# EAGLE board TEMP(NC_I2C_V2) (EAGLE 6.5.0)
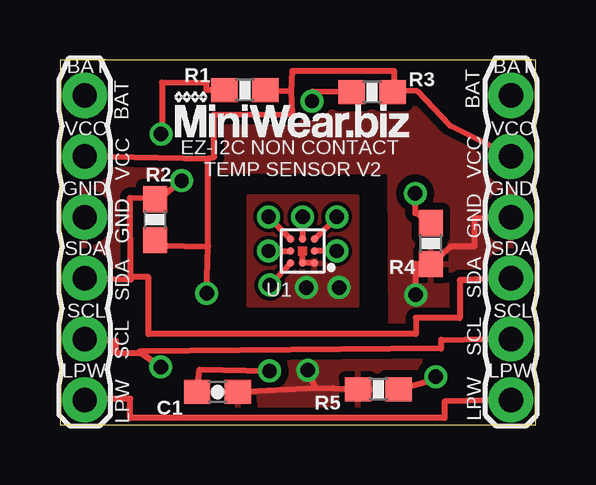
[diagram p0: board, top side]
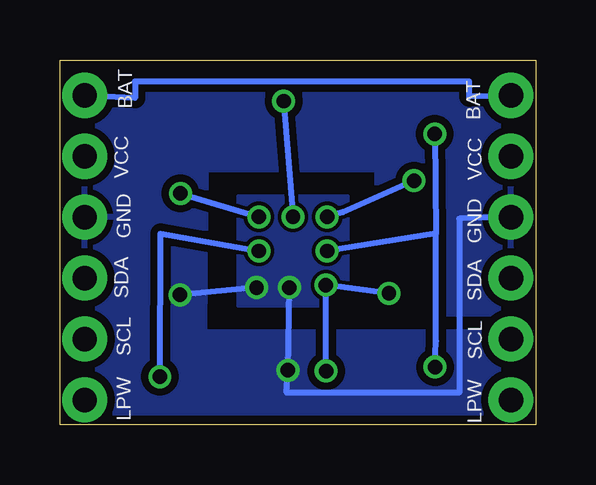
[diagram p1: board, bottom side, seen from below]

Size 19.84 x 15.21 mm. Coordinates in mm from the lower left corner, seen from the top.
Outline: 0,15.21 0,0 19.84,0 19.84,15.21 0,15.21
Copper layers (1*16): Top 0.0356mm / dielectric 1.5011mm / Bottom 0.0356mm
Design rules "oshParkPCBDesignRules": minimum track width 6mil, minimum drill 13mil, track to track 6mil, track to pad 6mil, pad to pad 6mil, via to via 6mil, smd to smd 6mil, copper to edge 15mil, drill to drill 6mil, minimum pad ring 7mil, minimum via ring 7mil, stop-mask expansion 3mil, vias tented up to drill 0mil, thermal gap 10mil

## Footprints (pad centres in the part's own frame; a part is rotated, then mirrored left to right if it is on the bottom)
0603-CAP = smd 1.1 x 1: 1 -0.85,0; 2 0.85,0
0603-RES = smd 1.1 x 1: 1 -0.85,0; 2 0.85,0
BGA8DS = smd 0.305 x 0.305: A1 0.5,-0.5; A2 0,-0.5; A3 -0.5,-0.5; B1 0.5,0; B3 -0.5,0; C1 0.5,0.5; C2 0,0.5; C3 -0.5,0.5
EZ-I2CHEADERV1 = drill 1.016 pad 1.88: BAT 0,-1.27; BAT1 17.78,-1.27; GND 0,-6.35; GND1 17.78,-6.35; LPOW 0,-13.97; LPOW1 17.78,-13.97; SCL 0,-11.43; SCL1 17.78,-11.43; SDA 0,-8.89; SDA1 17.78,-8.89; VCC 0,-3.81; VCC1 17.78,-3.81

## Placement (x,y rotation side)
C1  0.1uF  [0603-CAP]  6.57,1.36 0 top
R1  10k  [0603-RES]  7.71,13.95 0 top
R2  10k  [0603-RES]  3.96,8.55 270 top
R3  10k  [0603-RES]  13.02,13.86 0 top
R4  10k  [0603-RES]  15.47,7.55 90 top
R5  10k  [0603-RES]  13.28,1.47 0 top
U1  TMP006  [BGA8DS]  10.12,7.24 0 top
U$1  EZ-I2CHEADERV1  [EZ-I2CHEADERV1]  1.03,15 0 top
U$2  [LOGO2]  4.69,11.8 0 top

## Library data of the parts
C1 = SparkFun-Capacitors
R1-R5 = SparkFun-Resistors
U1 = SparkFun-DigitalIC
U$1 = UniqueInteractionsLib
U$2 = MiniWear_LOGO

## Nets
!DRDY: R3.1 U1.C2
ADR0: R4.2 U1.C1
ADR1: R5.2 U1.B1
GND: C1.2 R4.1 R5.1 U1.A1 U1.A2 U$1.GND U$1.GND1
N$1: U$1.BAT U$1.BAT1
N$2: U$1.LPOW U$1.LPOW1
SCL: R1.1 U1.B3 U$1.SCL U$1.SCL1
SDA: R2.1 U1.C3 U$1.SDA U$1.SDA1
VCC: C1.1 R1.2 R2.2 R3.2 U1.A3 U$1.VCC U$1.VCC1

## Tracks (layer width: path | path; a pad name or v marks a point on that pad's centre or on a via)
!DRDY  (via drill 0.6 pad 0.25)
  Top 0.254: R3.1 10.55,13.9 10.52,13.86 v10.51,13.49 | v10.12,8.66 U1.C2
  Bottom 0.254: v10.51,13.49 v10.12,8.66
ADR0  (via drill 0.6 pad 0.25)
  Top 0.254: R4.2 14.82,8.82 v14.82,9.64 | v11.54,8.66 U1.C1
  Bottom 0.254: v14.82,9.64 v11.54,8.66
ADR1  (via drill 0.6 pad 0.25)
  Top 0.254: R5.2 15.56,1.87 v15.67,2 | v11.54,7.24 U1.B1
  Bottom 0.254: v15.67,2 15.65,7.97 v11.54,7.24
GND  (via drill 0.6 pad 0.25)
  Top 0.254: 10.65,1.54 11.4,1.52 R5.1 | C1.2 10.65,1.54 | 10.65,1.54 v10.33,2.27 | v10.27,5.72 10.27,5.97 | v14.84,5.42 14.84,6.7 R4.1 16.29,7.43 17.29,7.43 17.29,8.59 U$1.GND1 | U1.A1 U1.A2 10.12,7.18
  Bottom 0.254: v10.27,5.72 v10.33,2.27 10.38,1.33 3.19,1.33 3.19,8.59 U$1.GND | v11.64,5.72 v14.84,5.42
  pour Top: 7.83,4.95 7.83,9.53 12.41,9.53 12.41,4.95
  pour Top (isolate 0.305): 0.43,3.86 0.33,-1.1 19.48,-1.1 19.39,15.01 0.24,15.01 0.23,4.61 6.68,4.61 6.65,10.6 13.77,10.55 13.8,3.81
  pour Bottom (isolate 0.305): 0.43,3.86 0.33,-1.1 19.48,-1.1 19.38,15.1 0.23,15.1 0.23,4.61 6.68,4.61 6.61,10.62 13.76,10.64 13.83,3.88
  pour Bottom: 7.83,9.53 12.41,9.53 12.41,4.95 7.83,4.95
N$1
  Bottom 0.254: U$1.BAT 2.77,13.67 2.77,14.31 16.71,14.31 16.71,13.62 U$1.BAT1
N$2
  Top 0.254: U$1.LPOW1 16.04,0.97 16.04,0.28 2.93,0.28 2.93,1.08 1.49,1.08 U$1.LPOW
SCL  (via drill 0.6, 0.6 pad 0.25)
  Top 0.254: R1.1 6.12,13.95 6.12,14.25 4.26,14.27 4.27,12.66 v4.21,12.12 | v8.7,7.24 U1.B3 | 15.89,3.54 15.89,3.51 | U$1.SCL1 15.89,3.51 | 15.89,3.51 15.89,3.17 3.32,3.05 v4.2,2.4 3.36,3 2.33,3 2.33,3.51 U$1.SCL
  Bottom 0.254: v4.21,12.12 4.16,7.97 | 4.16,7.97 v8.7,7.24 | v4.2,2.4 4.16,3.49 4.16,7.97
SDA  (via drill 0.6 pad 0.25)
  Top 0.254: v5.07,10.17 4.26,9.5 R2.1 3.95,9.44 2.92,9.47 2.95,6.15 | v8.7,8.66 U1.C3 | 2.95,6.15 2.95,6.05 U$1.SDA | 16.67,6.03 16.67,4.44 14.84,4.46 14.84,3.78 3.69,3.78 3.69,6.15 2.95,6.15 | U$1.SDA1 16.67,6.03 | 16.67,6.03 16.95,6.03
  Bottom 0.254: v5.07,10.17 8.04,8.86 v8.7,8.66
VCC  (via drill 0.6 pad 0.25)
  Top 0.254: v6.12,5.48 6.18,7.43 | 6.18,7.43 6.18,11.1 | 6.18,11.1 6.43,11.16 6.42,12.94 9.68,12.95 9.64,13.9 | v8.75,5.82 U1.A3 | C1.1 5.83,2.29 v8.74,2.23 | R2.2 3.99,7.46 4.22,7.46 6.18,7.43 | R1.2 9.64,13.9 | 9.64,13.9 9.68,14.75 13.94,14.75 13.94,13.76 R3.2 13.9,13.95 14.9,13.9 16.27,12.47 U$1.VCC1 | U$1.VCC 6.18,11.1
  Bottom 0.254: v6.12,5.48 v8.75,5.82 v8.74,2.23

## Text on the board
tNames: EZ-I2C NON CONTACT / TEMP SENSOR V2